# EAGLE board 1602 QAPASS LCD Template -0.5 (EAGLE 7.1.0)

Size 112 x 48 mm. Coordinates in mm from the lower left corner, seen from the top.
Outline: 0,0 112,0 112,48 0,48 0,0
Outline: 20.6,12 91.6,12 91.6,36 20.6,36 20.6,12
Outline: circle at 6,24 radius 2.5
Copper layers (1*16): Top 0.035mm / dielectric 1.5mm / Bottom 0.035mm
Design rules "default": minimum track width 10mil, minimum drill 24mil, track to track 8mil, track to pad 8mil, pad to pad 8mil, via to via 8mil, smd to smd 8mil, copper to edge 40mil, drill to drill 8mil, minimum pad ring 10mil, minimum via ring 8mil, stop-mask expansion 4mil, vias tented up to drill 0mil, thermal gap 10mil

## Footprints (pad centres in the part's own frame; a part is rotated, then mirrored left to right if it is on the bottom)
3,0 = hole 3: 0,0
DRILL_0.2500 = hole 6.35: 0,0

## Placement (x,y rotation side)
E$1  [3,0]  18.6,39.5 0 top
E$2  [3,0]  18.6,8.5 0 top
E$3  [3,0]  93.6,39.5 0 top
E$4  [3,0]  93.6,8.5 0 top
E$5  [DRILL_0.2500]  24.1,32.5 0 top
E$6  [DRILL_0.2500]  28.9,32.5 0 top
E$7  [DRILL_0.2500]  33.8,32.5 0 top
E$8  [DRILL_0.2500]  38.8,32.5 0 top
E$9  [DRILL_0.2500]  43.8,32.5 0 top
E$10  [DRILL_0.2500]  48.8,32.5 0 top
E$11  [DRILL_0.2500]  53.8,32.5 0 top
E$12  [DRILL_0.2500]  58.8,32.5 0 top
E$13  [DRILL_0.2500]  63.8,32.5 0 top
E$14  [DRILL_0.2500]  68.8,32.5 0 top
E$15  [DRILL_0.2500]  73.8,32.5 0 top
E$16  [DRILL_0.2500]  78.8,32.5 0 top
E$17  [DRILL_0.2500]  88.1,32.5 0 top
E$18  [DRILL_0.2500]  24.1,27 0 top
E$19  [DRILL_0.2500]  24.1,21 0 top
E$20  [DRILL_0.2500]  33.8,15.5 0 top
E$21  [DRILL_0.2500]  24.1,15.5 0 top
E$22  [DRILL_0.2500]  83.5,32.5 0 top
E$23  [DRILL_0.2500]  88.1,27 0 top
E$24  [DRILL_0.2500]  88.1,21 0 top
E$25  [DRILL_0.2500]  38.8,15.5 0 top
E$26  [DRILL_0.2500]  43.8,15.5 0 top
E$27  [DRILL_0.2500]  88.1,15.5 0 top
E$28  [DRILL_0.2500]  28.9,15.5 0 top
E$29  [DRILL_0.2500]  48.8,15.5 0 top
E$30  [DRILL_0.2500]  53.8,15.5 0 top
E$31  [DRILL_0.2500]  58.8,15.5 0 top
E$32  [DRILL_0.2500]  63.8,15.5 0 top
E$33  [DRILL_0.2500]  68.8,15.5 0 top
E$34  [DRILL_0.2500]  73.8,15.5 0 top
E$35  [DRILL_0.2500]  78.8,15.5 0 top
E$36  [DRILL_0.2500]  83.5,15.5 0 top

## Library data of the parts
E$1-E$4 = holes
E$5-E$36 = special-drill

## Text on the board
tNames: 4 x 3mm (or 3.25mm) drill | -0.5mm Tol. | Use 6mm drill | CHECK WITH YOUR LCD BEFORE DRILLING